# Altium PCB TB6612.PcbDoc
Units mil, origin at the board's own origin, x right, y up, seen from the top; angles counter-clockwise.
Board outline 800 x 600 mil, 2 copper layers (Top Layer, Bottom Layer); 6 components, 14 nets, 44 pads, 6 vias.
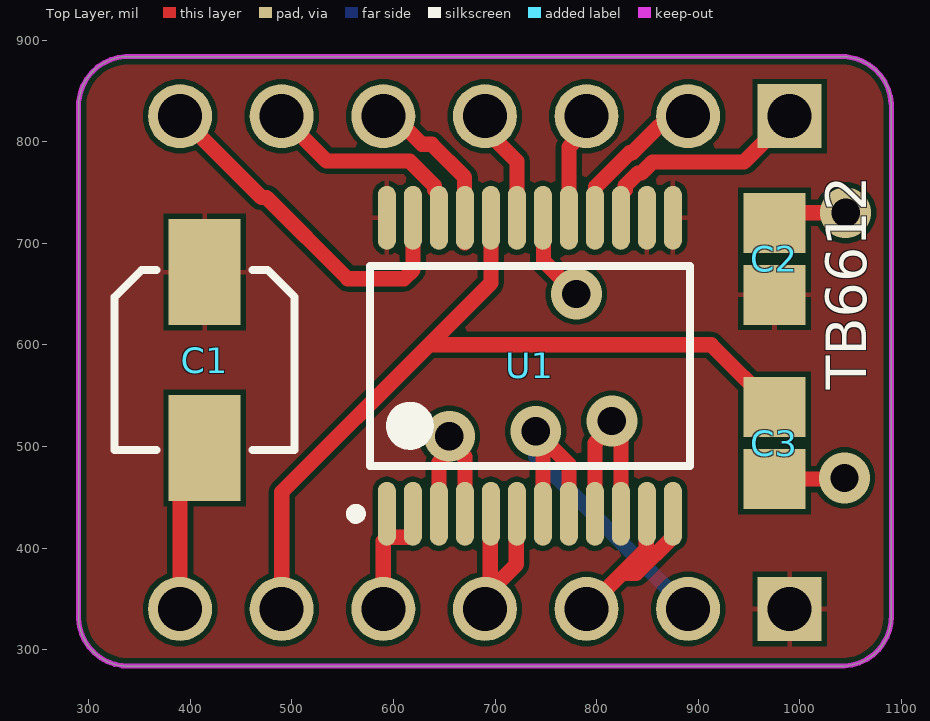
[diagram p0: Top Layer view]
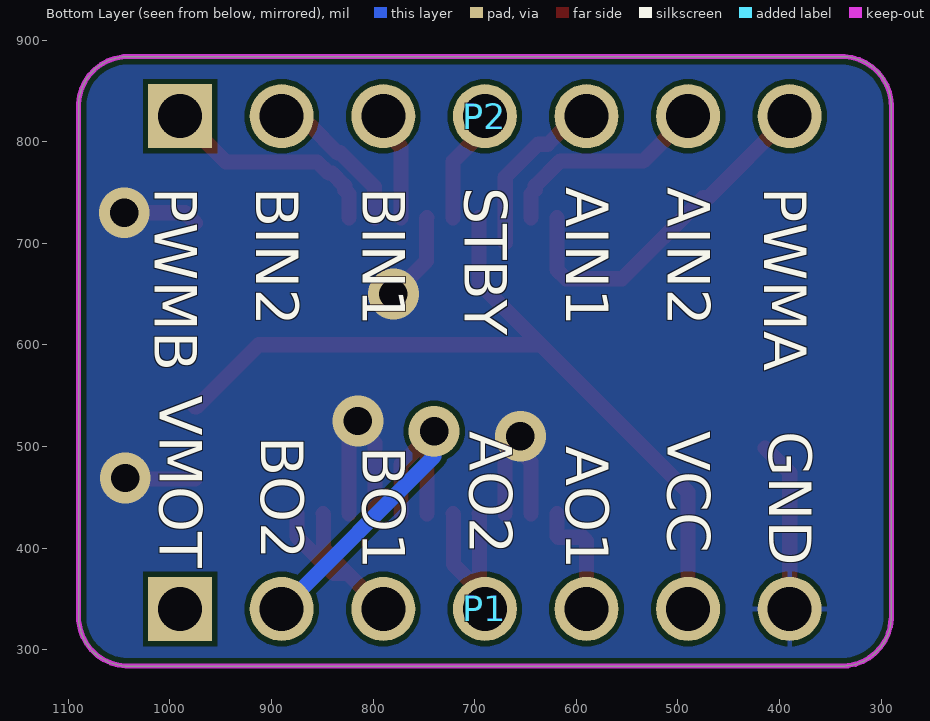
[diagram p1: Bottom Layer view, seen from below]

## Layer stack, top to bottom
Top Solder: solder mask 0.4, Solder Resist, Dk 3.5
Top Layer: signal copper 1.4
Dielectric 1: dielectric 12.6, FR-4, Dk 4.8
Bottom Layer: signal copper 1.4
Bottom Solder: solder mask 0.4, Solder Resist, Dk 3.5

## Board outline
332.79,284.12 cw(c338.77,332.52) 290.06,330.02 cw(c339.56,332.51) 290,332.51 290,835 cw(c339.55,835) 290.07,837.57 cw(c339.04,835.03) 290.36,840.97 cw(c338.76,834.99) 336.27,883.69 cw(c338.75,834.2) 338.76,883.76 1041.24,883.76 cw(c1041.25,834.2) 1043.81,883.69 cw(c1041.27,834.72) 1047.21,883.4 cw(c1041.23,834.99) 1089.94,837.49 cw(c1040.44,835) 1090,835 1090,332.51 cw(c1040.45,332.51) 1089.93,329.94 cw(c1040.96,332.48) 1089.64,326.55 cw(c1041.24,332.52) 1043.73,283.82 cw(c1041.25,333.32) 1041.24,283.76 338.76,283.76 cw(c338.75,333.31) 336.19,283.82 cw(c338.73,332.8)

## Design rules (kind name [scope] priority, off if disabled: settings)
BoardOutlineClearance [All] p1: gap=7.87 ignorepadtopadclearanceinfootprint=FALSE
Clearance [All] p1: gap=5 ignorepadtopadclearanceinfootprint=FALSE except(9.84: Arc-Hole Track-Hole SMDPad-Hole THPad-Hole Via-Hole Fill-Hole Poly-Hole Region-Hole Text-Hole)
ComponentClearance [All] p1: gap=5 collisioncheckmode=3 verticalgap=5 showdistances=TRUE
DiffPairsRouting [All] p1: maxlimit=10 minlimit=5 mostfreqgap=5 toplayer_minwidth=5 toplayer_maxwidth=1000 toplayer_prefwidth=5 bottomlayer_minwidth=5 bottomlayer_maxwidth=1000 bottomlayer_prefwidth=5 maxuncoupledlength=500
Height [All] p1: minheight=0 maxheight=71497.94 prefheight=500
HoleSize [All] p1: absolutevalues=TRUE maxlimit=248.03 minlimit=11.81 maxpercent=80.000 minpercent=20.000
HoleToHoleClearance [All] p1: gap=9.84 allowstackedmicrovias=FALSE
MinimumAnnularRing [All] p1: minimumring=3
MinimumSolderMaskSliver [All] p1: minsoldermaskwidth=0
PlaneClearance [All] p1: clearance=5
PlaneConnect PlaneConnectPowerPads [InPadClass('PowerPads')] p1: planeconnectstyle=Direct reliefexpansion=20 reliefentries=4 reliefconductorwidth=10 reliefairgap=10
PlaneConnect [All] p2: pad.planeconnectstyle=Relief pad.reliefexpansion=11.81 pad.reliefentries=4 pad.reliefconductorwidth=5 pad.reliefairgap=5 via.planeconnectstyle=Direct via.reliefexpansion=11.81 via.reliefentries=4 via.reliefconductorwidth=5 via.reliefairgap=5
PolygonConnect PolygonConnectPowerPads [All vs (InPadClass('PowerPads'))] p1: connectstyle=Direct reliefconductorwidth=10 reliefentries=4 polygonreliefangle="90 Angle" airgapwidth=10
PolygonConnect [All] p2: thpad.connectstyle=Relief thpad.reliefconductorwidth=5 thpad.reliefentries=4 thpad.polygonreliefangle="90 Angle" thpad.airgapwidth=5 smdpad.connectstyle=Relief smdpad.reliefconductorwidth=5 smdpad.reliefentries=4 smdpad.polygonreliefangle="90 Angle" smdpad.airgapwidth=5 via.connectstyle=Direct via.reliefconductorwidth=5 via.reliefentries=4 via.polygonreliefangle="90 Angle" via.airgapwidth=5
RoutingVias [All] p1: holewidth=11.81 width=23.62 viastyle="Through Hole" minholewidth=11.81 minwidth=23.62 maxholewidth=23.62 maxwidth=259.84
SilkToSilkClearance [All] p1: silktosilkclearance=0
SilkToSolderMaskClearance [IsPad] p1: minsilkscreentomaskgap=5 clearancetoexposedcopper=TRUE
SolderMaskExpansion [All] p1: expansion=2.95 istentingtop=FALSE
Width [All] p1: maxlimit=1000 minlimit=5 preferedwidth=5 minimp=50.000000 maximp=50.000000 favimp=50.000000
20 further rules are at their usual default settings.

## Components (designator, comment, footprint, x,y, rotation, side; value= is the part's Value field where it differs from the comment)
C1 "EEE-1CA100SR" PNSC-EEE1CA100SR_M 414.2,585 r270 top
C2 "0.1µF" CAPC2013X140X50ML20T25 975,684.57 r270 top
C3 "0.1µF" CAPC2013X140X50ML20T25 975,503.3 r90 top
P1 "61300711121" 61300711121 690,340 r180 bottom
P2 "61300711121" 61300711121 690,825 r180 bottom
U1 "TB6612FNG" TOSH-SSOP-24_M 734.25,579.33 r90 top

## Footprints (in the part's own frame and the unit in brackets; to place one, negate y for a bottom-side part, rotate by r counter-clockwise, add the part's x,y. Pads: shape width x height; smd on the part's side, far side on the other; paste and mask are expansions set on the pad)
61300711121 [mm] "Pin Header, pitch 2.54 mm, THT, Vertical, single row, 7p"
  rect 1.6x1.6 hole 1.1: 1(-7.62,0)
  round 1.6 hole 1.1: 2(-5.08,0) 3(-2.54,0) 4(0,0) 5(2.54,0) 6(5.08,0) 7(7.62,0)
  body extent -8.89,-1.27 8.89,1.27, height 8.57
CAPC2013X140X50ML20T25 [mm] "Chip Capacitor, 2-Leads, Body 2.00x1.25mm, IPC Low Density"
  rect 1.5x1.55 smd: 1(-0.9,0) 2(0.9,0)
  body extent -1.1,-0.72 1.1,0.72, height 1.4
PNSC-EEE1CA100SR_M [mm] "Aluminum Electrolytic Capacitor, 2-Leads, Body 4.5x4.5mm, IPC Low Density"
  rect 2.65x1.8 smd: 1(-2.2,0) 2(2.2,0)
  silkscreen extent -2.25,-2.25 2.25,2.25, body extent -2.75,-2.25 2.75,2.25, height 5.5
TOSH-SSOP-24_M [mm] "SOP, 24-Leads, Body 8x5.8mm, Pitch 0.65mm, IPC Low Density"
  oval 1.6x0.45 smd: 1(-3.7,3.575) 2(-3.7,2.925) 3(-3.7,2.275) 4(-3.7,1.625) 5(-3.7,0.975) 6(-3.7,0.325) 7(-3.7,-0.325) 8(-3.7,-0.975) 9(-3.7,-1.625) 10(-3.7,-2.275) 11(-3.7,-2.925) 12(-3.7,-3.575) 13(3.7,-3.575) 14(3.7,-2.925) 15(3.7,-2.275) 16(3.7,-1.625) 17(3.7,-0.975) 18(3.7,-0.325) 19(3.7,0.325) 20(3.7,0.975) 21(3.7,1.625) 22(3.7,2.275) 23(3.7,2.925) 24(3.7,3.575)
  silkscreen extent -3.82,-4 2.5,4.47, body extent -3.8,-4 3.8,4, height 1.6

## Part data
C1: library part CMP-2000-06199-1, "Aluminum Electrolytic Capacitor, 10 uF, +/- 20%, -40 to 85 degC, 2-Pin SMD, RoHS, Tape and Reel", AC Ripple Current=28mA, AE Capacitor Case=RadialCan-SMD, Capacitance=10µF, Capacitance Tolerance=±20%, Capacitor Mounting=SMD, Leakage Current=3µA, Life Time @ Temperature=2000hours@85°C, Manufacturer=Panasonic, Operating Life Temperature=85°C, Operating life Time=2000h, Operating Temperature Min=-40°C, Operating Temperature Range=-40°Cto+85°C, Package / Case=B, Package Description="2-Pin Surface Mount Device, Body 4.5 x 4.5 mm", Package Reference=EEE1CA100SR, Power Factor=0.16, Power Factor Frequency=120Hz, Tolerance +=20%, Voltage Rating=16V, Capacitance Tolerance ±=±20%, Capacitor Case Style=RadialCan-SMD, Capacitor Terminals=SMD, Datasheet URL=https://datasheet.ciiva.com/19458/1355487-19458346.pdf, Datasheet Version=04/2005, Diameter=4mm, External Depth=4.3mm, External Length / Height=5.4mm, External Width=4.3mm, Height=5.4mm, Lead Cross-section Width=0.65mm, Lead Length=1.8mm, Lead Spacing=1mm, Lifetime @ Temperature=2000hours@85°C, Manufacturer URL=http://www.panasonic.com/, Mounting Technology=SurfaceMount, No. of Pins=2, Operating Lifetime=2000h, Operating Temperature Max=85°C, Packaging=CutTape, Product Range=PANASONIC-SSeries, Ripple Current AC=28mA, Ripple Current Frequency=120Hz, Ripple Current Temperature=85°C, Series=VS, SVHC=NoSVHC(16-Dec-2013), Tape Width=12mm, Tolerance -=20%, Voltage Rating V DC=16V
C2 C3: library part CMP-2007-03242-1, "10µF ±10% 16V Ceramic Capacitor X5R 0805 (2012 Metric)", Part Number=CL21A106KOQNNNG
P1 P2: library part CMP-1502-01074-1, "THT Vertical Pin Header WR-PHD, Pitch 2.54 mm, Single Row, 7 pins", Contact Resistance=20mOhm, Manufacturer="Wurth Elektronik", Operating Temperature=-40to105degC, Rated Current=3A, Withstanding Voltage=500VAC, Working Voltage=250VAC, Datasheet URL=https://katalog.we-online.de/em/datasheet/6130xx11121.pdf, Gender=Male, Manufacturer URL=http://www.we-online.de, Mounting Technology=THT, Orientation=Vertical, Package Reference=61300711121, Packaging=Bag, Part Number=61300711121, Pin Number=7, Pitch=2.54mm, Publisher=WurthElektronik, Row Number=Single
U1: library part CMP-1773-00001-1, "Driver IC for Dual DC Motor, 15 V, -20 to 85 degC, 24-Pin SSOP, RoHS, Tape and Reel", Case\Package=TO-236-3, Forward Current="70 mA", Forward Voltage="1 V", Max Operating Temperature="125 degC", Max Power Dissipation="200 mW", Max Surge Current="100 mA", Min Operating Temperature="-55 degC", Package Quantity=3000, Peak Reverse Current="0.1 uA", ComponentLink1Description="Manufacturer URL", ComponentLink1URL=http://www.toshiba.com/, ComponentLink2Description=Datasheet, ComponentLink2URL=https://toshiba.semicon-storage.com/info/docget.jsp?did=10660&prodName=TB6612FNG, DatasheetVersion=Oct-14, Element Configuration="Common Cathode", Elements=2, Height="1.1 mm", Length="3 mm", Mount="Surface Mount", PackageDescription="24-Pin Shrink Small Outline Package Integrated Circuit, Body 7.8 x 5.6 mm, Pitch 0.65 mm", PackageReference=SSOP-24, Packaging="Tape and Reel", Pins=3, Radiation Hardening=No, REACH SVHC="No SVHC", Recovery Time="5 ns", RoHSCompliant=true, Width="1.4 mm"

## Via types
v1: diameter 50, hole 28, Top Layer to Bottom Layer, tented both sides, 6 vias

## Nets (pads, with @x,y where several pads share a name; then routed paths per layer and width w, separated by ;. In a path a pad name is that pad's centre, name@x,y a point inside that pad or via, vN(x,y) a via of type N, cw(c..) or ccw(c..) an arc to the next point about the centre after c; other vN are vias at no path point)
AIN1: P2.5 U1.21 | length 194.4
  Top Layer w15: P2.5 600.62,825 628.19,797.43 637.57,797.43 670,765 670,700.55 670.28,700.27 U1.21
AIN2: P2.6 U1.22 | length 212.1
  Top Layer w15: P2.6 534,781 615.93,781 640.45,756.48 640.45,752.61 644.68,748.37 U1.22
AO1: P1.5 U1.1 U1.2 | length 119.8
  Top Layer w15: P1.5 590,406.78 593.72,410.5 617.84,410.5 619.09,411.76 U1.2
AO2: P1.4 U1.5 U1.6 | length 182.2
  Top Layer w15: P1.4 690,352.99 P1.4@695.35,358.33 ; U1.5 695.35,433.14 P1.4@695.35,358.33 ; U1.6 720.94,433.14 720.94,383.92 P1.4@695.35,358.33
BIN1: P2.3 U1.17 | length 107.2
  Top Layer w15: U1.17 772.64,794.65 790,812.01 P2.3
BIN2: P2.2 U1.16 | length 150.7
  Top Layer w15: U1.16 798.75,725.52 798.75,755.47 832.28,789 834.97,789 861.79,815.82 880.82,815.82 P2.2
BO1: P1.3 U1.11 U1.12 | length 205.8
  Top Layer w15: P1.3 825,375 ; U1.11 848.89,433.14 848.89,398.89 825,375 ; U1.12 875,411.02 838.98,375 825,375
BO2: P1.2 U1.7 U1.8 | length 406.3
  Top Layer w15: v1(740,515) v1@747.05,507.95 ; U1.7 v1@747.05,507.95 ; U1.8 772.64,482.36 v1@747.05,507.95
  Bottom Layer w15: v1(740,515) 740,490 P1.2
GND: C1.2 C2.1 C3.1 P1.7 U1.3 U1.4 U1.9 U1.10 U1.18 | length 748.6
  Top Layer w15: P1.7 390,474.18 C1.2 ; U1.3 644.68,484.69 660,500 670.28,489.72 U1.4 ; U1.18 747.57,724.48 747.57,682.43 v1(780,650) ; U1.9 798.23,503.23 815,520 815,530 823.82,521.18 U1.10 ; C3.1 1042.86,467.86 v1@1045,470 ; C2.1 985,730 v1(1045,730)
  other v1: 1043.93,468.93 655,510 815,525
PWMA: P2.7 U1.23 | length 350.2
  Top Layer w15: P2.7 470,745 475,745 555,665 610.31,665 619.09,673.79 U1.23
PWMB: P2.1 U1.15 | length 223.6
  Top Layer w15: U1.15 823.82,748.37 828.05,752.61 828.05,756.48 840.56,769 844,769 855,780 945,780 P2.1
STBY: P2.4 U1.19 | length 113
  Top Layer w15: P2.4 690,812.01 721.46,780.56 U1.19
VCC: C3.2 P1.6 U1.20 | length 835.7
  Top Layer w15: P1.6 490,455 635,600 ; U1.20 695.87,660.87 635,600 ; C3.2 974.02,538.73 912.75,600 635,600
VM: C1.1 C2.2 P1.1 U1.13 U1.14 U1.24

## Polygon pours and split planes (outlines as drawn)
VM on Top Layer "VM_L01_P000" (solid, pour order 0): 332.79,284.12 cw(c338.77,332.52) 290.06,330.02 cw(c339.56,332.51) 290,332.51 290,835 cw(c339.55,835) 290.07,837.57 cw(c339.04,835.03) 290.36,840.97 cw(c338.76,834.99) 336.27,883.69 cw(c338.75,834.2) 338.76,883.76 1041.24,883.76 cw(c1041.25,834.2) 1043.81,883.69 cw(c1041.27,834.72) 1047.21,883.4 cw(c1041.23,834.99) 1089.94,837.49 cw(c1040.44,835) 1090,835 1090,332.51 cw(c1040.45,332.51) 1089.93,329.94 cw(c1040.96,332.48) 1089.64,326.55 cw(c1041.24,332.52) 1043.73,283.82 cw(c1041.25,333.32) 1041.24,283.76 338.76,283.76 cw(c338.75,333.31) 336.19,283.82 cw(c338.73,332.8)
GND on Bottom Layer "GND_L02_P001" (solid, pour order 1): 290.06,330.02 cw(c339.56,332.51) 290,332.51 290,835 cw(c339.55,835) 290.07,837.57 cw(c339.04,835.03) 290.36,840.97 cw(c338.76,834.99) 336.27,883.69 cw(c338.75,834.2) 338.76,883.76 1041.24,883.76 cw(c1041.25,834.2) 1043.81,883.69 cw(c1041.27,834.72) 1047.21,883.4 cw(c1041.23,834.99) 1089.94,837.49 cw(c1040.44,835) 1090,835 1090,332.51 cw(c1040.45,332.51) 1089.93,329.94 cw(c1040.96,332.48) 1089.64,326.55 cw(c1041.24,332.52) 1043.73,283.82 cw(c1041.25,333.32) 1041.24,283.76 338.76,283.76 cw(c338.75,333.31) 336.19,283.82 cw(c338.73,332.8) 332.79,284.12 cw(c338.77,332.52)

## Keep-outs
Keep-Out Layer:
  the board outline again, w5

## Silkscreen, mask and mechanical layers (free items; w line width, h text height)
Top Overlay:
  text "TB6612" at 1065.45,555.59 h40 r90
Bottom Overlay:
  text "PWMA" at 415,755 h42 r90
  text "AIN2" at 510,755 h42 r90
  text "AIN1" at 610,755 h42 r90
  text "STBY" at 710,755 h42 r90
  text "BIN1" at 810,755 h42 r90
  text "BIN2" at 915,755 h42 r90
  text "PWMB" at 1015,755 h42 r90
  text "VMOT" at 1010,550 h42 r90
  text "GND" at 410,515 h42 r90
  text "VCC" at 510,515 h42 r90
  text "AO2" at 705,515 h42 r90
  text "BO2" at 910,510 h42 r90
  text "AO1" at 610,500 h42 r90
  text "BO1" at 810,500 h42 r90